# Altium PCB Lamp.PcbDoc
Units mm, origin at the board's own origin, x right, y up, seen from the top; angles counter-clockwise.
Board outline 100 x 100 mm, 2 copper layers (Top Layer, Bottom Layer), stack 1.3 mm thick; 34 components, 36 nets, 137 pads, 10 vias.
Unrouted connection lines stored in the file: 1.
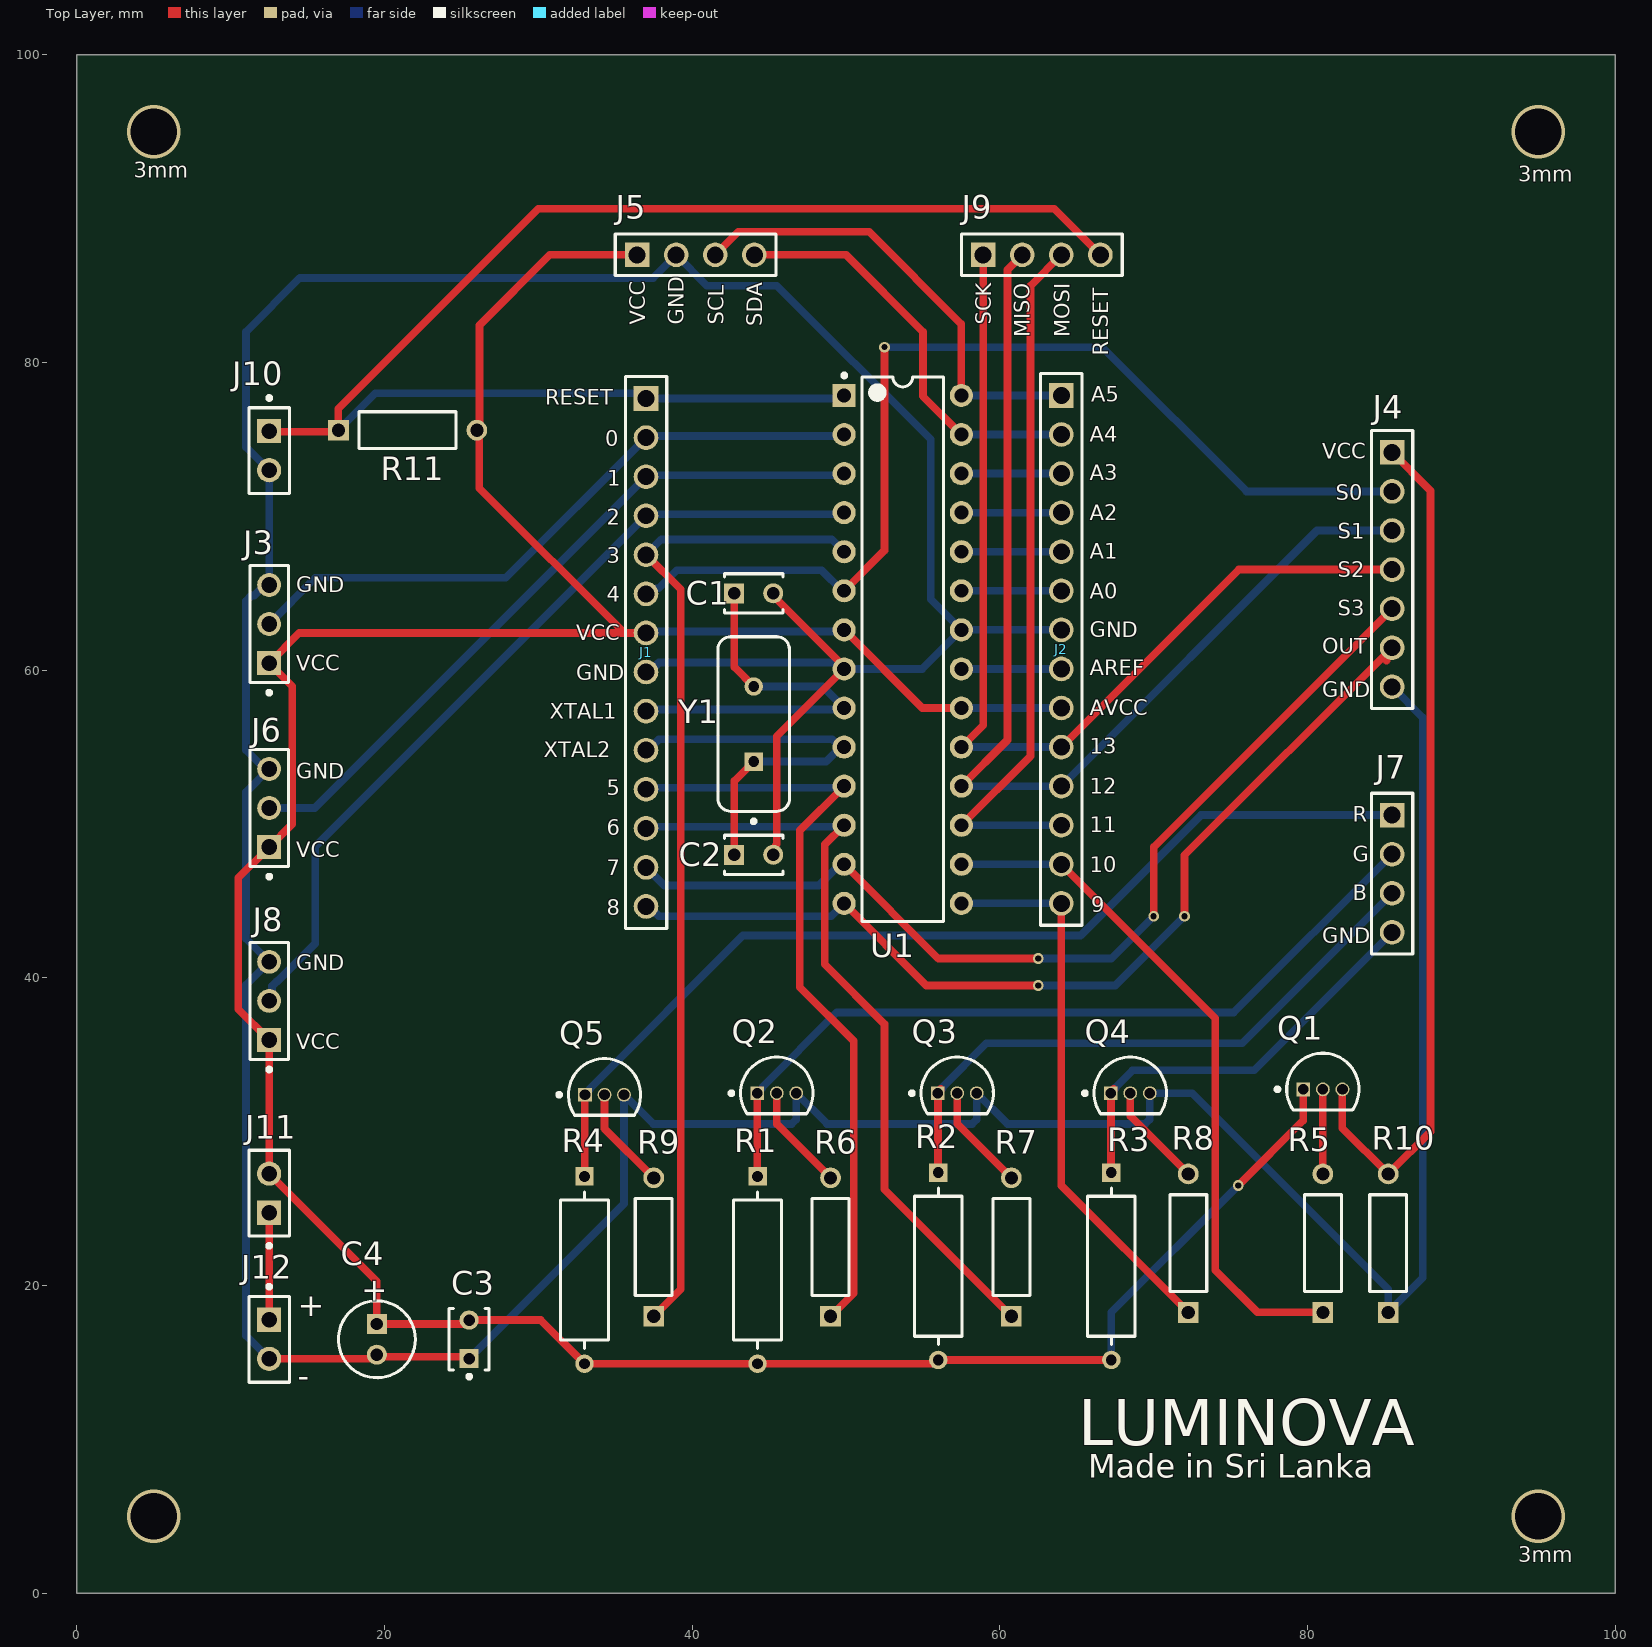
[diagram p0: Top Layer view]
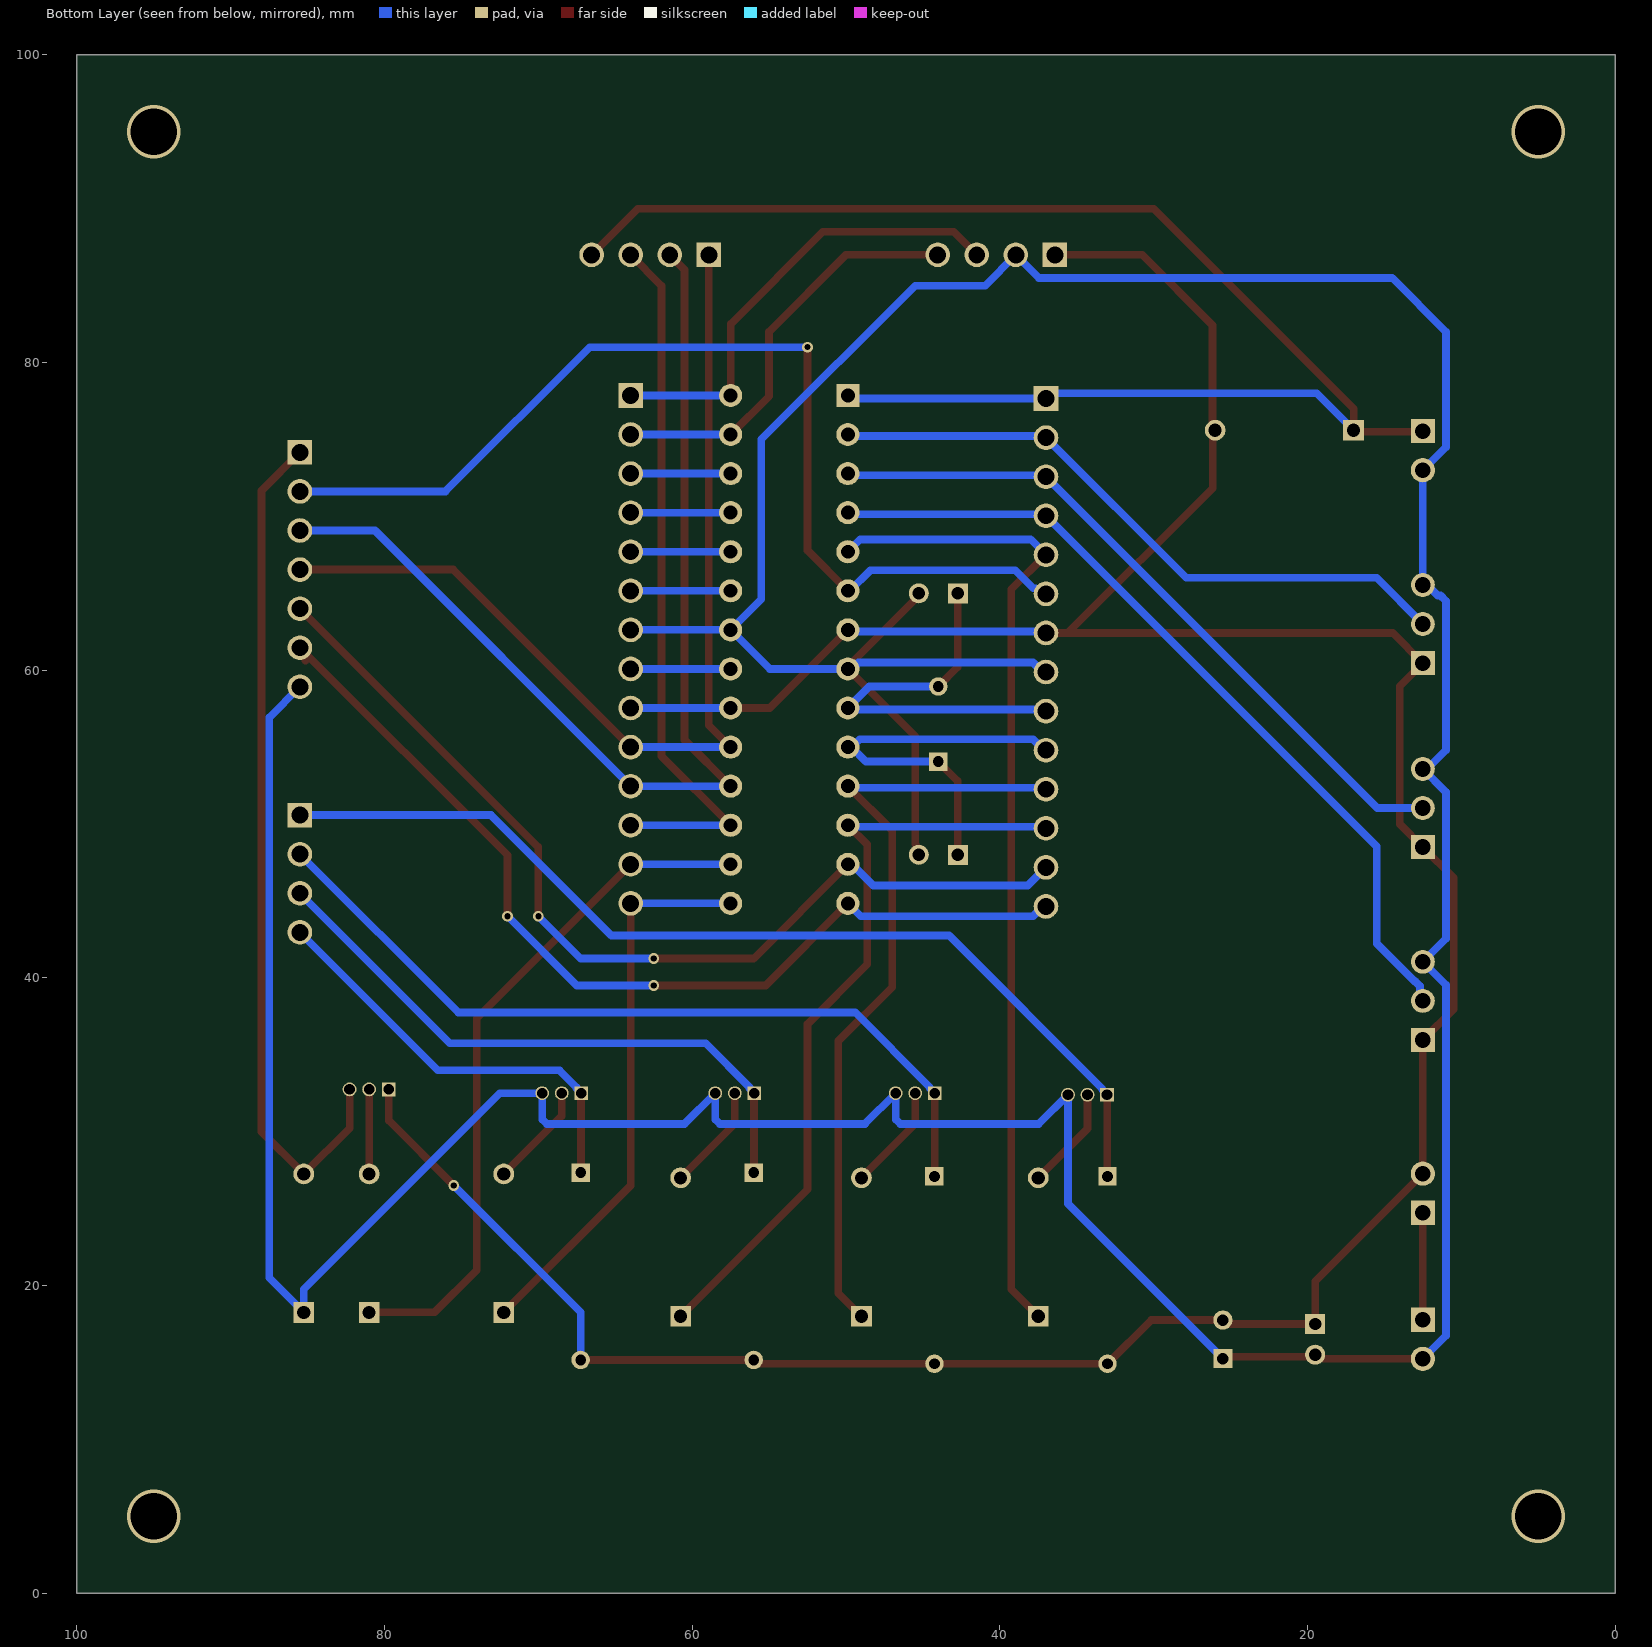
[diagram p1: Bottom Layer view, seen from below]

## Layer stack, top to bottom
Top Solder: solder mask 0.1, SM-001, Dk 4
Top Layer: signal copper 0.2
Dielectric 1: dielectric 0.9, FR-4, Dk 4.8
Bottom Layer: signal copper 0.2
Bottom Solder: solder mask 0.1, SM-001, Dk 4

## Board outline
0,0 0,100 100,100 100,0

## Design rules (kind name [scope] priority, off if disabled: settings)
Clearance [All] p1: gap=0.254 ignorepadtopadclearanceinfootprint=FALSE
PolygonConnect [All] p1: connectstyle=Relief reliefconductorwidth=0.254 reliefentries=4 polygonreliefangle="90 Angle" airgapwidth=0.254
RoutingVias [All] p1: holewidth=0.711 width=1.27 viastyle="Through Hole" minholewidth=0.4 minwidth=0.7 maxholewidth=3 maxwidth=3.5
SolderMaskExpansion [All] p1: expansion=0.102 istentingtop=FALSE
Width [All] p1: maxlimit=0.5 minlimit=0.5 preferedwidth=0.5
30 further rules are at their usual default settings.

## Classes and differential pairs
component class Sheet2: C3 C4 J3 J4 J5 J6 J7 J8 J9 J10 J11 J12 R11
component class Sheet1: C1 C2 J1 J2 Q1 Q2 Q3 Q4 Q5 R1 R2 R3 R4 R5 R6 R7 R8 R9 R10 U1 Y1

## Components (designator, comment, footprint, x,y, rotation, side; value= is the part's Value field where it differs from the comment)
C1 "22pF" KEMT-C315-THT-2 44,65 r0 top
C2 "22pF" KEMT-C315-THT-2 44,48 r0 top
C3 "100nF" VISH-K104K15X7RF5TL2 25.5,16.5 r90 top
C4 "10uF" CAPPR55-200-1100X500X1200 19.5,16.5 r270 top
J1 "Atmega Pinout Left" 61301411121 37,61.15 r270 top
J2 "Atmega Pinout Right" 61301411121 64,61.35 r270 top
J3 "Down Buttton" MOLX-22-28-4033_V 12.5,63 r90 top
J4 "Color Sensor" 61300711121 85.5,66.54 r270 top
J5 "Display" 61300411121 40.23,87 r0 top
J6 "Enter Button" MOLX-22-28-4033_V 12.5,51.04 r90 top
J7 "RGB" 61300411121 85.5,46.77 r270 top
J8 "Exit Button" MOLX-22-28-4033_V 12.5,38.5 r90 top
J9 "Program Pins" 61300411121 62.73,87 r0 top
J10 "Reset" FP-M20-9990246-MFG 12.5,74.27 r270 top
J11 "Power Switch" FP-M20-9990246-MFG 12.5,26 r90 top
J12 "Power" FP-M20-9990246-MFG 12.5,16.5 r270 top
Q1 "P2N2222AG" ONSC-TO-92-3-29-11 81,32.75 r0 top
Q2 "P2N2222AG" ONSC-TO-92-3-29-11 45.5,32.5 r0 top
Q3 "P2N2222AG" ONSC-TO-92-3-29-11 57.23,32.5 r0 top
Q4 "P2N2222AG" ONSC-TO-92-3-29-11 68.48,32.5 r0 top
Q5 "P2N2222AG" ONSC-TO-92-3-29-11 34.3,32.4 r0 top
R1 "270ohm" FP-CFR50J2K2-MFG 44.25,21 r270 top
R2 "270ohm" FP-CFR50J2K2-MFG 56,21.25 r270 top
R3 "1kohm" FP-CFR50J2K2-MFG 67.25,21.25 r270 top
R4 "270ohm" FP-CFR50J2K2-MFG 33,21 r270 top
R5 "10kohm" RESA60-630X240 81,22.75 r90 top
R6 "10kohm" RESA60-630X240 49,22.5 r90 top
R7 "10kohm" RESA60-630X240 60.75,22.5 r90 top
R8 "10kohm" RESA60-630X240 72.25,22.75 r90 top
R9 "10kohm" RESA60-630X240 37.5,22.5 r90 top
R10 "100kohm" RESA60-630X240 85.25,22.75 r90 top
R11 "10kohm" RESA60-630X240 21.5,75.6 r0 top
U1 "ATmega328-PU" 28P3 53.69,61.35 r0 top
Y1 "FOXSLF/160-20" FOX-FOXSLF160-20 44,56.5 r90 top

## Footprints (in the part's own frame and the unit in brackets; to place one, negate y for a bottom-side part, rotate by r counter-clockwise, add the part's x,y. Pads: shape width x height; smd on the part's side, far side on the other; paste and mask are expansions set on the pad)
28P3 [mm] "28-Pin Plastic Dual In-Line Package (PDIP)"
  rect 1.5x1.5 hole 0.9: 1(-3.81,16.51)
  round 1.5 hole 0.9: 2(-3.81,13.97) 3(-3.81,11.43) 4(-3.81,8.89) 5(-3.81,6.35) 6(-3.81,3.81) 7(-3.81,1.27) 8(-3.81,-1.27) 9(-3.81,-3.81) 10(-3.81,-6.35) 11(-3.81,-8.89) 12(-3.81,-11.43) 13(-3.81,-13.97) 14(-3.81,-16.51) 15(3.81,-16.51) 16(3.81,-13.97) 17(3.81,-11.43) 18(3.81,-8.89) 19(3.81,-6.35) 20(3.81,-3.81) 21(3.81,-1.27) 22(3.81,1.27) 23(3.81,3.81) 24(3.81,6.35) 25(3.81,8.89) 26(3.81,11.43) 27(3.81,13.97) 28(3.81,16.51)
  silkscreen extent -3.93,-17.7 2.65,17.93, body extent -3.6,-17.65 3.6,17.65, height 4.58
61300411121 [mm] "Pin Header, pitch 2.54 mm, THT, Vertical, single row, 4p"
  rect 1.6x1.6 hole 1.1: 1(-3.81,0)
  round 1.6 hole 1.1: 2(-1.27,0) 3(1.27,0) 4(3.81,0)
  silkscreen extent -5.23,-1.35 5.23,1.35, body extent -5.08,-1.27 5.08,1.27, height 8.57
61300711121 [mm] "Pin Header, pitch 2.54 mm, THT, Vertical, single row, 7p"
  rect 1.6x1.6 hole 1.1: 1(-7.62,0)
  round 1.6 hole 1.1: 2(-5.08,0) 3(-2.54,0) 4(0,0) 5(2.54,0) 6(5.08,0) 7(7.62,0)
  silkscreen extent -9.04,-1.35 9.04,1.35, body extent -8.89,-1.27 8.89,1.27, height 8.57
61301411121 [mm] "Pin Header, pitch 2.54 mm, THT, Vertical, single row, 14p"
  rect 1.6x1.6 hole 1.1: 1(-16.51,0)
  round 1.6 hole 1.1: 2(-13.97,0) 3(-11.43,0) 4(-8.89,0) 5(-6.35,0) 6(-3.81,0) 7(-1.27,0) 8(1.27,0) 9(3.81,0) 10(6.35,0) 11(8.89,0) 12(11.43,0) 13(13.97,0) 14(16.51,0)
  silkscreen extent -17.93,-1.35 17.93,1.35, body extent -17.78,-1.27 17.78,1.27, height 8.57
CAPPR55-200-1100X500X1200 [mm] "THD, 2-Leads, Dia 5mm, Body Length 11mm"
  rect 1.3x1.3 hole 0.8: 1(-1,0)
  round 1.3 hole 0.8: 2(1,0)
  silkscreen extent -2.5,-2.5 2.5,2.5, body extent -2.5,-2.5 2.5,2.5, height 12
FOX-FOXSLF160-20 [mm] "THD, 2-Leads, Body 11.35x4.65mm"
  rect 1.2x1.2 hole 0.7: 1(-2.44,0)
  round 1.2 hole 0.7: 2(2.44,0)
  silkscreen extent -6.45,-2.32 5.68,2.32, body extent -5.67,-2.32 5.68,2.33, height 3.6
FP-CFR50J2K2-MFG [mm]
  rect 1.2x1.2 hole 0.7 paste-1000 mask+0: 1(-6.09,0)
  round 1.2 hole 0.7 paste-1000 mask+0: 2(6.09,0)
  silkscreen extent -5.09,-1.55 5.09,1.55, body extent -6.79,-1.65 6.79,1.65, height 0.25
FP-M20-9990246-MFG [mm]
  rect 1.57x1.57 hole 1.02 paste-1000 mask+0: 1(-1.27,0)
  round 1.57 hole 1.02 paste-1000 mask+0: 2(1.27,0)
  silkscreen extent -3.55,-1.32 2.79,1.32, body extent -2.89,-1.42 2.89,1.42, height 0.25
KEMT-C315-THT-2 [mm] "THD, 2-Leads, Body 3.81x2.54mm"
  rect 1.3x1.3 hole 0.8: 1(-1.27,0)
  round 1.3 hole 0.8: 2(1.27,0)
  silkscreen extent -1.91,-1.27 1.91,1.27, body extent -1.91,-1.27 1.91,1.27, height 4.66
MOLX-22-28-4033_V [mm] "THD, 3-Leads, Body 7.62x2.49mm, Pitch 2.54mm"
  rect 1.55x1.55 hole 1.02: 1(-2.54,0)
  round 1.55 hole 1.02: 2(0,0) 3(2.54,0)
  silkscreen extent -4.58,-1.24 3.81,1.24, body extent -3.81,-1.24 3.81,1.24, height 8.38
ONSC-TO-92-3-29-11 [mm] "TO, 3-Leads, Body Dia 4.7mm, Pitch 1.27mm"
  rect 0.9x0.9 hole 0.7: 1(-1.27,0)
  round 0.9 hole 0.7: 2(0,0) 3(1.27,0)
  silkscreen extent -3.07,-1.34 2.35,2.35, body extent -2.35,-1.33 2.36,2.36, height 7.87
RESA60-630X240 [mm] "Axial Resistor, 2-Leads, Dia 2.4mm, Body Length 6.3mm"
  rect 1.35x1.35 hole 0.85: 1(-4.5,0)
  round 1.35 hole 0.85: 2(4.5,0)
  silkscreen extent -3.15,-1.2 3.15,1.2, body extent -3.15,-1.2 3.15,1.2, height 2.4
VISH-K104K15X7RF5TL2 [mm] "THD, 2-Leads, Body 4x2.6mm"
  rect 1.25x1.25 hole 0.75: 1(-1.25,0)
  round 1.25 hole 0.75: 2(1.25,0)
  silkscreen extent -2.55,-1.3 2,1.3, body extent -2,-1.3 2,1.3, height 5.6

## Part data
C1 C2: library part CMP-1664-00008-1, "Capacitor, Ceramic, 22 pF, +/-10 %, 100 V, -55 to 125 degC, 2-Pin THD, RoHS, Bulk", Case\Package=TO-220, Max Input Voltage="40 V", Max Operating Temperature="125 degC", Max Ouput Current="1.5 A", Min Input Voltage="4.2 V", Min Operating Temperature="0 degC", Output Voltage="1.2 V", Package Quantity=50, ComponentLink1Description="Manufacturer URL", ComponentLink1URL=http://www.kemet.com/, ComponentLink2Description=Datasheet, ComponentLink2URL=http://capacitoredge.kemet.com/capedge2/DataSheet/Datasheet-C315C220K1G5TA.pdf?pn=C315C220K1G5TA{BULK}, DatasheetVersion=Aug-16, Height="9.28 mm", Length="10.28 mm", Mount="Through Hole", Output Current="1.5 A", Outputs=1, PackageDescription="2-Pin Through Hole Device, Body 3.81 x 2.54 mm", PackageReference=C315-THT-2, Packaging=Rail/Tube, Pins=3, Radiation Hardening=No, REACH SVHC="No SVHC", RoHSCompliant=true, Weight="0.08113 oz", Width="4.82 mm"
C3: library part CMP-2000-06508-1, "Ceramic Capacitor, 100 nF, +/- 10%, 50 V, -55 to 125 degC, 2-Pin THD, RoHS, Tape and Reel", Capacitance=0.1µF, Manufacturer=Vishay, Operating Temperature=-55°C~125°C, Package / Case=Radial, Package Description="2-Pin Through Hole Device, Body 4 x 2.6 mm", Package Reference=K104K15X7RF5TL2, Ratings=-, Standard Package=1, Temperature Coefficient=X7R, Tolerance=±10%, Voltage - Rated=50V, Applications=GeneralPurpose, Catalog Drawings=Mono-KapSide2-15_5.58Mono-KapSide1_15, Category=Capacitors, Datasheet URL=http://www.vishay.com/docs/45171/kseries.pdf, Datasheet Version=08/2013, Family=CeramicCapacitors, Features=-, Height - Seated (Max)="0.220\"(5.58mm)", Lead Spacing="0.098\"(2.50mm)", Lead Style=Straight, Manufacturer URL=http://www.vishay.com/, Mounting Technology=ThroughHole, Mounting Type=ThroughHole, Online Catalog=Mono-Kap™Series, Other Names=BC1084CT, Packaging=CutTape(CT), Series=Mono-Kap™K, Size / Dimension="0.157\"Lx0.098\"W(4.00mmx2.50mm)", Thickness (Max)=-
C4: library part CMP-1665-00038-2, "Aluminum Electrolytic Capacitor, 10 uF, +/- 20%, 50 V, -40 to 85 degC, 2-Pin THD, RoHS, Bulk", Case/Package=Radial, Dielectric Material=Aluminium, Leakage Current=3uA, Manufacturer=Panasonic, Max Operating Temperature=85degC, Min Operating Temperature=-40degC, Package Description="2-Pin Radial Lead, Dia 5 mm, Height 12 mm", Package Quantity=200, Package Reference=CAPPR55-200-1100X500X1200, Ripple Current=65mA, Tolerance=20%, Voltage=50V, Capacitance=10uF, Datasheet URL=https://industrial.panasonic.com/cdbs/www-data/pdf/RDF0000/ABA0000C1218.pdf, Datasheet Version="Rev. 05, 10/2016", Diameter=5mm, Dissipation Factor=0.12%, Height=11mm, Height - Seated (Max)=0.472inch, Lead Diameter=0.5mm, Lead Free=LeadFree, Lead Pitch=2mm, Lead/Base Style=Straight, Length=11mm, Life (Hours)=2000Hour, Manufacturer URL=http://www.panasonic.com/, Mount=ThroughHole, Number of Pins=2, Packaging=Bulk, Radiation Hardening=No, REACH SVHC=NoSVHC, Ripple Current (AC)=65mA, RoHSCompliant=true, Termination=Radial, Voltage Rating=50V, Voltage Rating (DC)=50V
J1 J2: library part CMP-1502-01091-1, "THT Vertical Pin Header WR-PHD, Pitch 2.54 mm, Single Row, 14 pins", Contact Resistance=20mOhm, Manufacturer="Wurth Elektronik", Operating Temperature=-40to105degC, Package Reference=61301411121, Rated Current=3A, Withstanding Voltage=500VAC, Working Voltage=250VAC, Datasheet URL=https://katalog.we-online.de/em/datasheet/6130xx11121.pdf, Gender=Male, Manufacturer URL=http://www.we-online.de, Mounting Technology=THT, Orientation=Vertical, Packaging=Bag, Part Number=61301411121, Pin Number=14, Pitch=2.54mm, Publisher=WurthElektronik, Row Number=Single
J3 J6 J8: library part CMP-1676-00001-5, "Male Header, Pitch 2.54 mm, 1 x 3 Position, Height 8.38 mm, Tail Length 3.18 mm, RoHS, Bulk", Colour=Black, Current Rating="4 A", Manufacturer=Molex, Max Operating Temperature="75 degC", Min Operating Temperature="0 degC", Package Quantity=1, Voltage Rating="250 V", ComponentLink1Description="Manufacturer URL", ComponentLink1URL=http://www.molex.com/, ComponentLink2Description=Datasheet, ComponentLink2URL=http://www.molex.com/pdm_docs/sd/022284033_sd.pdf, Contact Finish=Gold, Contact Material=Brass, Contact Plating=Gold, DatasheetVersion="Rev. G, 01/2012", Height="8.38 mm", Lead Pitch="0.1 inch", Length="7.62 mm", Mount="Through Hole", Mounting Technology="Through Hole", PackageDescription="Male Header, Pitch 2.54 mm, 1 x 3 Position, Height 8.38 mm, Tail Length 3.18 mm", PackageReference=22-28-4033, Packaging=Bulk, Pins=3, REACH SVHC=Unknown, RoHSCompliant=true, Rows=1
J4: library part CMP-1502-01074-1, "THT Vertical Pin Header WR-PHD, Pitch 2.54 mm, Single Row, 7 pins", Contact Resistance=20mOhm, Manufacturer="Wurth Elektronik", Operating Temperature=-40to105degC, Package Reference=61300711121, Rated Current=3A, Withstanding Voltage=500VAC, Working Voltage=250VAC, Datasheet URL=https://katalog.we-online.de/em/datasheet/6130xx11121.pdf, Gender=Male, Manufacturer URL=http://www.we-online.de, Mounting Technology=THT, Orientation=Vertical, Packaging=Bag, Part Number=61300711121, Pin Number=7, Pitch=2.54mm, Publisher=WurthElektronik, Row Number=Single
J5 J7 J9: library part CMP-1502-01064-1, "THT Vertical Pin Header WR-PHD, Pitch 2.54 mm, Single Row, 4 pins", Contact Resistance=20mOhm, Manufacturer="Wurth Elektronik", Operating Temperature=-40to105degC, Package Reference=61300411121, Rated Current=3A, Withstanding Voltage=500VAC, Working Voltage=250VAC, Datasheet URL=https://katalog.we-online.de/em/datasheet/6130xx11121.pdf, Gender=Male, Manufacturer URL=http://www.we-online.de, Mounting Technology=THT, Orientation=Vertical, Packaging=Bag, Part Number=61300411121, Pin Number=4, Pitch=2.54mm, Publisher=WurthElektronik, Row Number=Single
J10 J11 J12: library part CMP-15831-000009-1, "CONN HEADER VERT 2POS 2.54MM", Current Rating=3A, Manufacturer=Harwin, Manufacturer Part Number=M20-9990246, Temperature="-40°C to +105°C", Temperature Range High=+105°C, Temperature Range Low=-40°C, Automotive=No, Category=Conn, ComponentLink2Description=Datasheet, ComponentLink2URL=https://cdn.harwin.com/pdfs/M20-999.pdf, Conn Gender=Male, Conn Orientation=Vertical, Contact Material=Tin,Nickel, Device Class L1=Connectors, Device Class L2="Headers and Wire Housings", Device Class L3=unset, Digikey Description="CONN HEADER VERT 2POS 2.54MM", Height=8.99mm, Lead Free=Yes, Mouser Description="2.54mm (0.1\") Pitch SIL Vertical PC Tail Pin Header, 6.1mm mating pin height, tin, 2 contacts", Number Of Contacts=2, Number Of Rows=1, Octopart=https://octopart.com/m20-9990246-harwin-2590635, Package=M20-9990246, Pitch=2.54mm, RoHS=TRUE
Q1 Q2 Q3 Q4 Q5: library part CMP-1048-01402-1, "Amplifier Transistor, NPN Silicon, 3-Pin TO-92, Pb-Free, Bulk Box", Manufacturer="On Semiconductor", ComponentLink1Description="Manufacturer URL", ComponentLink1URL=http://www.onsemi.com/, ComponentLink2Description=Datasheet, ComponentLink2URL=http://www.onsemi.com/pub_link/Collateral/P2N2222A-D.PDF, ComponentLink3Description="Package Specification", ComponentLink3URL=http://www.onsemi.cn/pub_link/Collateral/2N6426-D.PDF, DatasheetVersion="Rev. 7", fT Min (MHz)=300, IC Continuous (A)=0.6, Mounting Technology="Through Hole", PackageDescription="3-Pin Transistor Outline, Body 4.825 x 3.685 mm, Pitch 1.27 mm", PackageReference=TO-92-3-29-11_AM_SL, PackageVersion="Rev. AM", Packing="Bulk Box", PartNumber=P2N2222AG, Polarity=NPN, RoHS=TRUE
R1 R2 R4: library part CMP-03212-000011-1, "RES 270 OHM 5% 1/2W AXIAL", Case/Package=Axial, Max Operating Temperature=155°C, Max Power Dissipation=500mW, Min Operating Temperature=-55°C, Number of Resistors=1, Package Quantity=3000, Resistance=2.2kR, Resistance Tolerance=5%, Resistor Type="Thin Film", Temperature Coefficient=0ppm/°C, Voltage Rating=350V, Diameter=3mm, ELV=Compliant, Length=9mm, Mount=Axial, Number of Terminations=2, Packaging="Cut Tape", Power Rating=500mW, Radiation Hardening=No, REACH SVHC="No SVHC", RoHS Compliant=Yes, Series="CFR50, Neohm", Technology="CARBON FILM", Termination=Axial, Tolerance=5%, Voltage Rating (DC)=350V
R3: library part CMP-03212-000011-1, "RES 1k OHM 5% 1/2W AXIAL", Case/Package=Axial, Max Operating Temperature=155°C, Max Power Dissipation=500mW, Min Operating Temperature=-55°C, Number of Resistors=1, Package Quantity=3000, Resistance=2.2kR, Resistance Tolerance=5%, Resistor Type="Thin Film", Temperature Coefficient=0ppm/°C, Voltage Rating=350V, Diameter=3mm, ELV=Compliant, Length=9mm, Mount=Axial, Number of Terminations=2, Packaging="Cut Tape", Power Rating=500mW, Radiation Hardening=No, REACH SVHC="No SVHC", RoHS Compliant=Yes, Series="CFR50, Neohm", Technology="CARBON FILM", Termination=Axial, Tolerance=5%, Voltage Rating (DC)=350V
R5 R6 R7 R8 R9 R11: library part CMP-1659-00074-2, "Axial Resistor, 10 KOhm, +/- 1%, 0.25 W, -55 to 155 degC, 2-Pin THD, RoHS, Bulk", Case\/Package=Axial, Manufacturer=Yageo, Max Operating Temperature=155degC, Max Power Dissipation=250mW, Min Operating Temperature=-55degC, Package Description="2-Pin Axial Lead, Dia 2.4 mm, Body Length 6.3 mm", Package Quantity=200, Package Reference=MFR-25, Resistance=10KOhm, Temperature Coefficient=100ppm\/degreesC, Tolerance=1%, Voltage Rating=250V, Voltage Rating (DC)=200V, Composition=MetalFilm, Datasheet URL=http://www.yageo.com/documents/recent/Yageo%20LR_MFR_2013.pdf, Datasheet Version=04/2013, Lead Free=LeadFree, Length=0.248inch, Manufacturer URL=http://www.yageo.com/, Military Standard=Not, Mount=ThroughHole, Mounting Technology=ThroughHole, Number of Terminations=2, Packaging=Bulk, Power Rating=250mW, RoHSCompliant=True, Termination=Axial
R10: library part CMP-1659-00074-2, "Axial Resistor, 100 KOhm, +/- 1%, 0.25 W, -55 to 155 degC, 2-Pin THD, RoHS, Bulk", Case\/Package=Axial, Manufacturer=Yageo, Max Operating Temperature=155degC, Max Power Dissipation=250mW, Min Operating Temperature=-55degC, Package Description="2-Pin Axial Lead, Dia 2.4 mm, Body Length 6.3 mm", Package Quantity=200, Package Reference=MFR-25, Resistance=10KOhm, Temperature Coefficient=100ppm\/degreesC, Tolerance=1%, Voltage Rating=250V, Voltage Rating (DC)=200V, Composition=MetalFilm, Datasheet URL=http://www.yageo.com/documents/recent/Yageo%20LR_MFR_2013.pdf, Datasheet Version=04/2013, Lead Free=LeadFree, Length=0.248inch, Manufacturer URL=http://www.yageo.com/, Military Standard=Not, Mount=ThroughHole, Mounting Technology=ThroughHole, Number of Terminations=2, Packaging=Bulk, Power Rating=250mW, RoHSCompliant=True, Termination=Axial
U1: library part CMP-0095-00015-2, "8-bit AVR Microcontroller, 32KB Flash, 1KB EEPROM, 2KB SRAM, 28-pin PDIP, Industrial Grade (-40°C to 85°C)", ComponentLink1Description="Manufacturer URL", ComponentLink1URL=http://www.atmel.com/, ComponentLink2Description="ATmega48A/48PA/88A/88PA/168A/168PA/328/328P Datasheet", ComponentLink2URL=http://www.atmel.com/dyn/resources/prod_documents/8271.pdf, ComponentLink3Description="ATmega48A/48PA/88A/88PA/168A/168PA/328/328P Summary", ComponentLink3URL=http://www.atmel.com/dyn/resources/prod_documents/8271S.pdf, DatasheetVersion="revD, May-2011", PackageDescription="28-lead (0.300\"/7.62mm Wide) Plastic Dual Inline Package (PDIP)", PackageReference=28P3, PackageVersion="revB, Sep-2001", RevisionNote="DatasheetVersion updated. URLs added."
Y1: library part CMP-1749-00003-1, "Resistance Weld Thru-Hole Crystal, 16 MHz, -20 to 70 degC, 2-Pin THD, RoHS, Bulk", Case\Package=Axial, Max Operating Temperature="155 degC", Min Operating Temperature="-55 degC", Package Quantity=200, Power Rating="250 mW", Resistance="221 kohm", Tolerance=1%, Voltage Rating="250 V", ComponentLink1Description="Manufacturer URL", ComponentLink1URL=http://www.foxonline.com/, ComponentLink2Description=Datasheet, ComponentLink2URL=http://www.foxonline.com/pdfs/hc49slf.pdf, DatasheetVersion=Mar-15, Length="0.248 inch", Mount="Through Hole", PackageDescription="2-Pin Through Hole Device, Body 11.35 x 4.65 mm", PackageReference=FOXSLF160-20, Packaging=Bulk, RoHSCompliant=true

## Via types
v1: diameter 0.7, hole 0.4, Top Layer to Bottom Layer, 6 vias
v2: diameter 3.5, hole 3, Top Layer to Bottom Layer, 4 vias

## Nets (pads, with @x,y where several pads share a name; then routed paths per layer and width w, separated by ;. In a path a pad name is that pad's centre, name@x,y a point inside that pad or via, vN(x,y) a via of type N, cw(c..) or ccw(c..) an arc to the next point about the centre after c; other vN are vias at no path point)
A0: J2.6 U1.23 | length 6.5
  Bottom Layer w0.5: U1.23 J2.6
A1: J2.5 U1.24 | length 6.5
  Bottom Layer w0.5: U1.24 J2.5
A2: J2.4 U1.25 | length 6.5
  Bottom Layer w0.5: U1.25 J2.4
A3: J2.3 U1.26 | length 6.5
  Bottom Layer w0.5: U1.26 J2.3
A4/SDA: J2.2 J5.4 U1.27 | length 27.2
  Top Layer w0.5: J5.4 50,87 55,82 55,77.82 U1.27
  Bottom Layer w0.5: U1.27 J2.2
A5/SCL: J2.1 J5.3 U1.28 | length 30.2
  Top Layer w0.5: J5.3 43,88.5 51.5,88.5 57.5,82.5 U1.28
  Bottom Layer w0.5: U1.28 J2.1
AREF: J2.8 U1.21 | length 6.5
  Bottom Layer w0.5: U1.21 J2.8
"Blue Pin": J1.12 R7.1 U1.12 | length 50.4
  Top Layer w0.5: U1.12 48.626,48.666 48.626,40.874 52.5,37 52.5,26.25 R7.1
  Bottom Layer w0.5: J1.12 37.1,49.82 49.78,49.82 U1.12
"Down Pin": J1.2 J3.2 U1.2 | length 42.5
  Bottom Layer w0.5: J3.2 15.5,66 27.88,66 J1.2 37.1,75.22 49.78,75.22 U1.2
"Enter Pin": J1.3 J1.4 J6.2 J8.2 U1.3 U1.4 | length 101.1
  Bottom Layer w0.5: J8.2 12.689,38.689 12.689,39.468 12.981,39.761 13.03,39.761 15.5,42.231 15.5,48.54 J1.4 37.1,70.14 49.78,70.14 U1.4 ; J6.2 15.46,51.04 J1.3 37.1,72.68 49.78,72.68 U1.3
GND: C1.2 C2.2 C3.1 C4.2 J1.8 J2.7 J3.3 J4.7 J5.2 J6.3 J8.3 J10.2 J12.2 Q2.3 Q3.3 Q4.3 Q5.3 R10.1 U1.8 U1.22 | length 327
  Top Layer w0.5: J12.2 19.014,15.23 19.284,15.5 C4.2 19.625,15.375 25.375,15.375 C3.1 ; C2.2 45.423,48.153 45.423,48.616 45.5,48.693 45.5,55.7 U1.8 49.88,60.235 45.27,64.845 C1.2 ; Q2.3 Q2.3@46.77,32.579
  Bottom Layer w0.5: J12.2 11,16.73 11,39.54 J8.3 11,42.54 11,52.08 J6.3 12.216,53.58 11.296,54.5 11.293,54.5 11,54.793 11,64.5 11.354,64.854 11.529,64.854 12.216,65.54 J3.3 J10.2 11,74.5 11,82 14.5,85.5 37.46,85.5 J5.2 40.96,85 45.5,85 55.5,75 55.5,64.62 U1.22 ; C3.1 35.57,25.32 Q5.3 37.47,30.5 46.477,30.5 46.77,30.793 Q2.3 48.77,30.5 58.207,30.5 58.5,30.793 Q3.3 60.5,30.5 69.457,30.5 69.75,30.793 Q4.3 72.5,32.5 85.25,19.75 R10.1 87.5,20.5 87.5,56.92 J4.7 ; J1.8 37.223,59.88 37.843,60.5 49.189,60.5 49.609,60.08 U1.8 54.96,60.08 U1.22 ; J2.7 U1.22
"Green Pin": J1.11 R6.1 U1.11 | length 50.7
  Top Layer w0.5: R6.1 50.5,19.5 50.5,35.895 47,39.395 47,49.58 U1.11
  Bottom Layer w0.5: J1.11 37.1,52.36 49.78,52.36 U1.11
MOSI: J2.12 J9.3 U1.17 | length 46.3
  Top Layer w0.5: U1.17 62,54.42 62,85 J9.3
  Bottom Layer w0.5: U1.17 J2.12
NetJ4_1: J4.1 Q1.3 R10.2 | length 55.8
  Top Layer w0.5: Q1.3 82.27,30.23 R10.2 88,30 88,71.66 J4.1
NetJ7_1: J7.1 Q5.1 R4.1 | length 65.4
  Top Layer w0.5: R4.1 33.015,27.105 33.015,32.385 Q5.1
  Bottom Layer w0.5: Q5.1 33.346,32.716 33.346,32.795 43.301,42.75 65.25,42.75 73.08,50.58 J7.1
NetJ7_2: J7.2 Q2.1 R1.1 | length 53.5
  Top Layer w0.5: R1.1 44.24,27.1 44.24,32.49 Q2.1 Q2.1@44.43,32.7
  Bottom Layer w0.5: Q2.1 44.546,32.816 44.546,32.895 49.401,37.75 75.21,37.75 J7.2
NetJ7_3: J7.3 Q3.1 R2.1 | length 40.6
  Top Layer w0.5: R2.1 55.98,27.36 55.98,32.48 Q3.1 56.16,32.7 Q3.1@56.16,32.779 ; J7.3@85.424,45.424 J7.3
  Bottom Layer w0.5: Q3.1 56.276,32.816 56.276,32.895 59.131,35.75 75.75,35.75 J7.3
NetJ7_4: J7.4 Q4.1 R3.1 | length 28.2
  Top Layer w0.5: R3.1 67.23,27.36 67.23,32.48 Q4.1 67.41,32.7 Q4.1@67.41,32.779
  Bottom Layer w0.5: Q4.1 67.526,32.816 67.526,32.895 68.631,34 76.54,34 J7.4
NetQ1_2: Q1.2 R5.2 | length 5.5
  Top Layer w0.5: R5.2 Q1.2
NetQ2_2: Q2.2 R6.2 | length 6.9
  Top Layer w0.5: Q2.2 45.5,30.5 R6.2
NetQ3_2: Q3.2 R7.2 | length 7
  Top Layer w0.5: Q3.2 57.23,30.52 R7.2
NetQ4_2: Q4.2 R8.2 | length 6.8
  Top Layer w0.5: Q4.2 68.48,31.02 R8.2
NetQ5_2: Q5.2 R9.2 | length 6.7
  Top Layer w0.5: Q5.2 34.3,30.2 R9.2
PWR: J11.1 J12.1 | length 7
  Top Layer w0.5: J12.1 J11.1
"Red Pin": J1.5 R9.1 U1.5 | length 64.8
  Top Layer w0.5: J1.5 39.25,65.25 39.25,19.75 R9.1
  Bottom Layer w0.5: J1.5 38,68.5 49.08,68.5 U1.5
Reset: J1.1 J9.4 J10.1 R11.1 U1.1 | length 96.3
  Top Layer w0.5: J10.1 12.54,75.5 17,75.5 17,77 30,90 63.54,90 J9.4
  Bottom Layer w0.5: R11.1 19.4,78 36.66,78 J1.1 49.68,77.66 U1.1
"RGB GND": J2.14 R8.1 U1.15 | length 36.5
  Top Layer w0.5: J2.14 64,26.5 R8.1
  Bottom Layer w0.5: U1.15 J2.14
S0: J1.6 J4.2 U1.6 | length 67.9
  Top Layer w0.5: U1.6 52.5,67.78 v1(52.5,81)
  Bottom Layer w0.5: J1.6 37.298,64.96 37.664,65.326 37.826,65.326 39,66.5 48.407,66.5 49.747,65.16 U1.6 ; v1(52.5,81) 66.661,81 76.041,71.62 J4.2
S1/MISO: J2.11 J4.3 J9.2 U1.18 | length 71.1
  Top Layer w0.5: U1.18 60.5,55.46 60.5,86.04 J9.2
  Bottom Layer w0.5: U1.18 J2.11 80.62,69.08 J4.3
S2/SCK: J2.10 J4.4 J9.1 U1.19 | length 65.4
  Top Layer w0.5: U1.19 58.92,56.42 J9.1 ; J2.10 75.54,66.54 J4.4
  Bottom Layer w0.5: U1.19 J2.10
S3: J1.13 J4.5 U1.13 | length 64.2
  Top Layer w0.5: U1.13 56.01,41.25 v1(62.5,41.25) ; v1(70,44) 70,48.5 J4.5
  Bottom Layer w0.5: J1.13 38.18,46 48.229,46 49.609,47.38 U1.13 ; v1(62.5,41.25) 67.25,41.25 v1(70,44)
"Sensor Out": J1.14 J4.6 U1.14 | length 63.7
  Top Layer w0.5: U1.14 55.22,39.5 v1(62.5,39.5) ; v1(72,44) 72,47.96 J4.6 85.5,61.162 85.134,60.796 85.134,60.634
  Bottom Layer w0.5: J1.14 37.203,44.64 37.843,44 49.04,44 U1.14 ; v1(62.5,39.5) 67.5,39.5 v1(72,44)
"Sensor PWR": J2.13 R5.1 U1.16 | length 45.2
  Top Layer w0.5: J2.13 74,37.38 74,21 76.75,18.25 R5.1
  Bottom Layer w0.5: U1.16 J2.13
VCC: C3.2 C4.1 J1.7 J2.9 J3.1 J5.1 J6.1 J8.1 J11.2 Q1.1 R1.2 R2.2 R3.2 R4.2 R11.2 U1.7 U1.20 | length 211.4
  Top Layer w0.5: J5.1 30.75,87 26.175,82.425 26.175,75.425 26.055,75.425 26.163,75.317 26.163,71.837 35.58,62.42 ; J1.7 36.79,62.42 35.58,62.42 ; U1.7 54.96,57.54 U1.20 ; R3.2 R2.2 55.811,15.16 55.561,14.91 R1.2 R4.2 30.16,17.75 C3.2 25.297,17.75 25.047,17.5 C4.1 19.5,20.27 J11.2 J8.1 10.5,37.96 10.5,46.5 J6.1 14,50 14,58.96 J3.1 14.46,62.42 35.58,62.42 ; v1(75.5,26.5) 79.73,30.73 Q1.1
  Bottom Layer w0.5: J1.7 37.1,62.52 49.78,62.52 U1.7 ; U1.20 J2.9 ; R3.2 67.25,18.25 v1(75.5,26.5)
XTAL1: C1.1 J1.9 U1.9 Y1.2 | length 26
  Top Layer w0.5: C1.1 42.73,60.21 Y1.2
  Bottom Layer w0.5: J1.9 37.1,57.44 49.78,57.44 U1.9 48.48,58.94 Y1.2
XTAL2: C2.1 J1.10 U1.10 Y1.1 | length 26
  Top Layer w0.5: C2.1 42.73,52.79 Y1.1
  Bottom Layer w0.5: J1.10 37.143,54.8 37.843,55.5 49.109,55.5 49.609,55 U1.10@49.639,55 ; Y1.1 48.699,54.06 U1.10@49.639,55 ; U1.10 U1.10@49.639,55
copper on no net:
  other v2: 5,5 95,5 5,95 95,95

## Silkscreen, mask and mechanical layers (free items; w line width, h text height)
Top Overlay:
  text "3mm" at 3.704,92.004 h1
  text "3mm" at 93.704,91.754 h1
  text "VCC" at 36.946,82.454 h1 r90
  text "GND" at 39.446,82.454 h1 r90
  text "SCL" at 42.046,82.454 h1 r90
  text "SCK" at 59.446,82.454 h1 r90
  text "SDA" at 44.546,82.354 h1 r90
  text "MISO" at 61.946,81.654 h1 r90
  text "MOSI" at 64.546,81.654 h1 r90
  text "RESET" at 67.046,80.454 h1 r90
  text "A5" at 65.954,77.454 h1
  text "RESET" at 30.454,77.254 h1
  text "A4" at 65.854,74.854 h1
  text "0" at 34.354,74.554 h1
  text "VCC" at 80.954,73.754 h1
  text "A3" at 65.854,72.354 h1
  text "1" at 34.472,71.982 h1
  text "S0" at 81.854,71.054 h1
  text "A2" at 65.854,69.754 h1
  text "2" at 34.454,69.454 h1
  text "S1" at 81.954,68.554 h1
  text "A1" at 65.854,67.254 h1
  text "3" at 34.454,66.954 h1
  text "S2" at 81.954,66.054 h1
  text "GND" at 14.254,65.054 h1
  text "A0" at 65.854,64.654 h1
  text "4" at 34.454,64.454 h1
  text "S3" at 81.954,63.554 h1
  text "GND" at 65.854,62.154 h1
  text "VCC" at 32.454,61.954 h1
  text "OUT" at 80.954,61.054 h1
  text "VCC" at 14.254,59.954 h1
  text "AREF" at 65.854,59.654 h1
  text "GND" at 32.454,59.354 h1
  text "GND" at 80.954,58.254 h1
  text "AVCC" at 65.854,57.054 h1
  text "XTAL1" at 30.754,56.854 h1
  text "13" at 65.854,54.554 h1
  text "XTAL2" at 30.354,54.354 h1
  text "GND" at 14.254,52.954 h1
  text "12" at 65.854,51.954 h1
  text "5" at 34.454,51.854 h1
  text "R" at 82.954,50.154 h1
  text "11" at 65.854,49.454 h1
  text "6" at 34.454,49.254 h1
  text "VCC" at 14.254,47.854 h1
  text "G" at 82.954,47.554 h1
  text "10" at 65.854,46.854 h1
  text "7" at 34.454,46.654 h1
  text "B" at 82.954,45.054 h1
  text "9" at 65.954,44.254 h1
  text "8" at 34.454,44.054 h1
  text "GND" at 80.954,42.254 h1
  text "GND" at 14.254,40.504 h1
  text "VCC" at 14.254,35.354 h1
  text "+" at 14.354,18 h1.52
  text "-" at 14.354,13.392 h1.52
  text "LUMINOVA" at 65.11,9.625 h3
  text "Made in Sri Lanka" at 65.754,7.504 h1.52
  text "3mm" at 93.704,2.004 h1

## Text inside footprints (layer, text, board x,y; h text height)
C4: Top Overlay "+" at 18.7,20.5 h1.5 r270